# Altium PCB PCB1.PcbDoc
Units mil, origin at the board's own origin, x right, y up, seen from the top; angles counter-clockwise.
Board outline 6000 x 4000 mil, 2 copper layers (Top Layer, Bottom Layer); 13 components, 3 nets, 33 pads, 0 vias.
Unrouted connection lines stored in the file: 6.
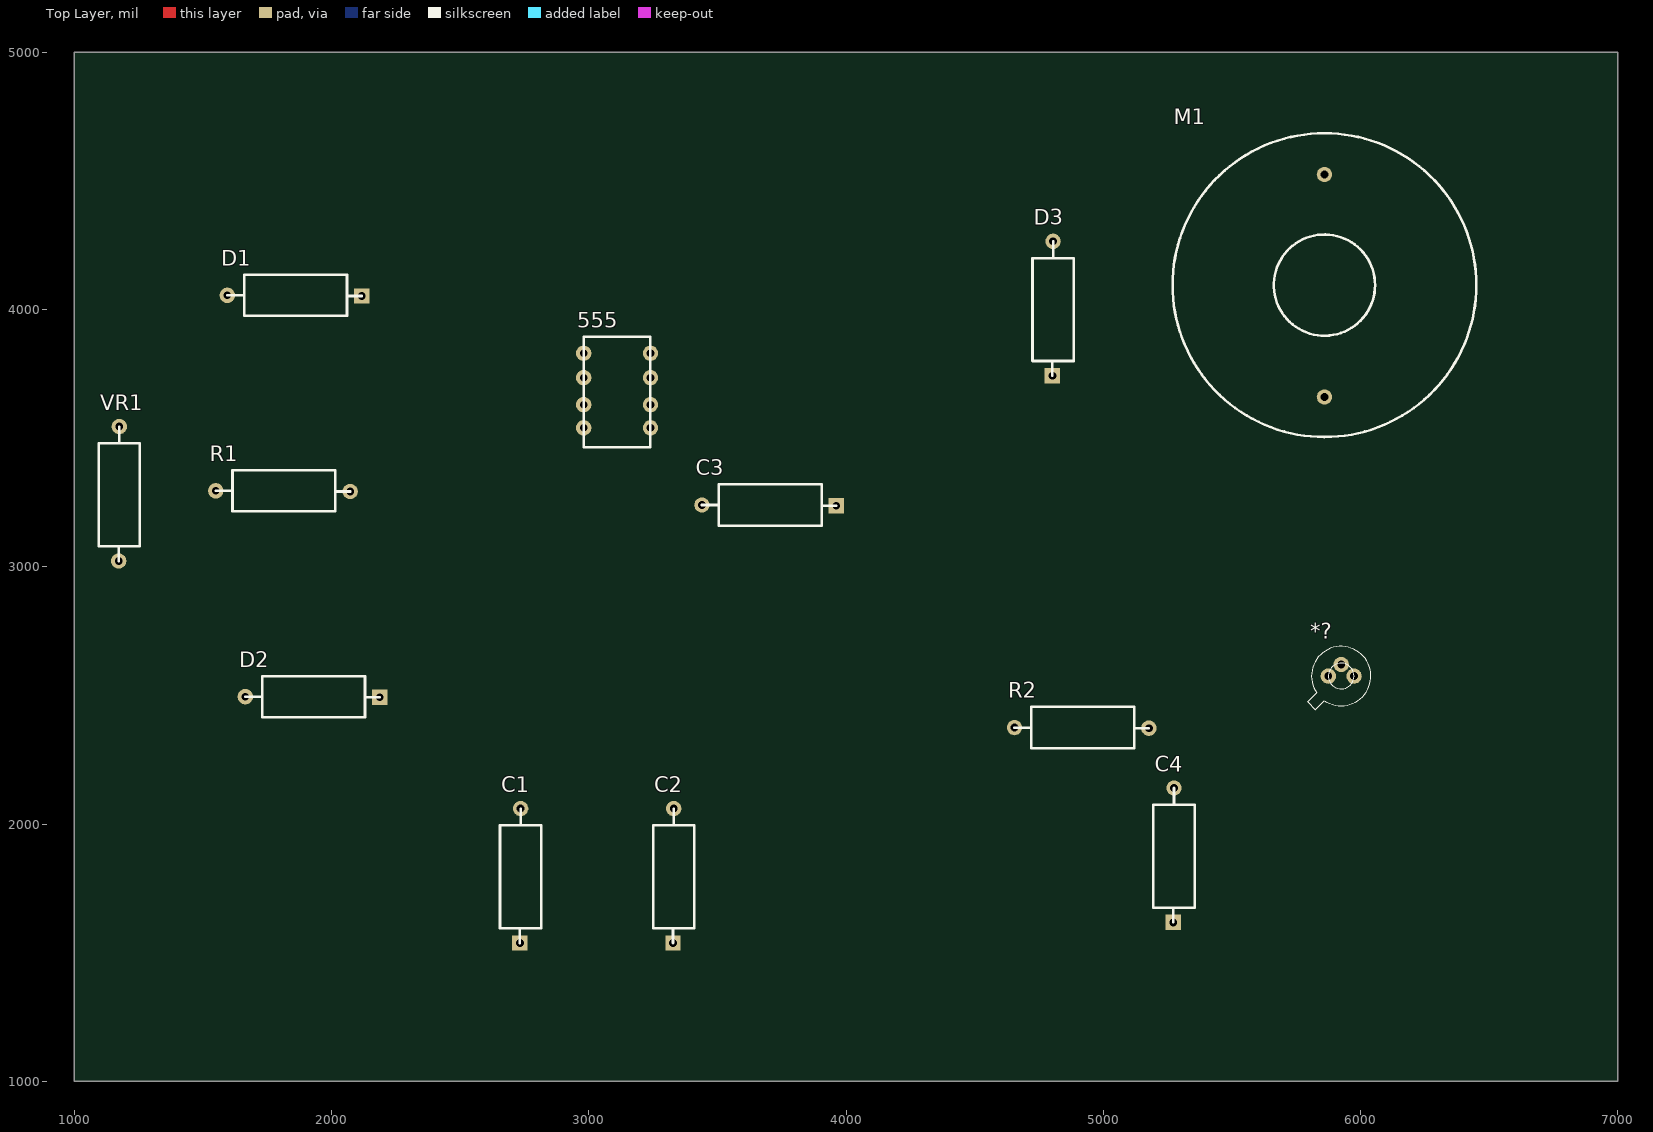
[diagram p0: Top Layer view]
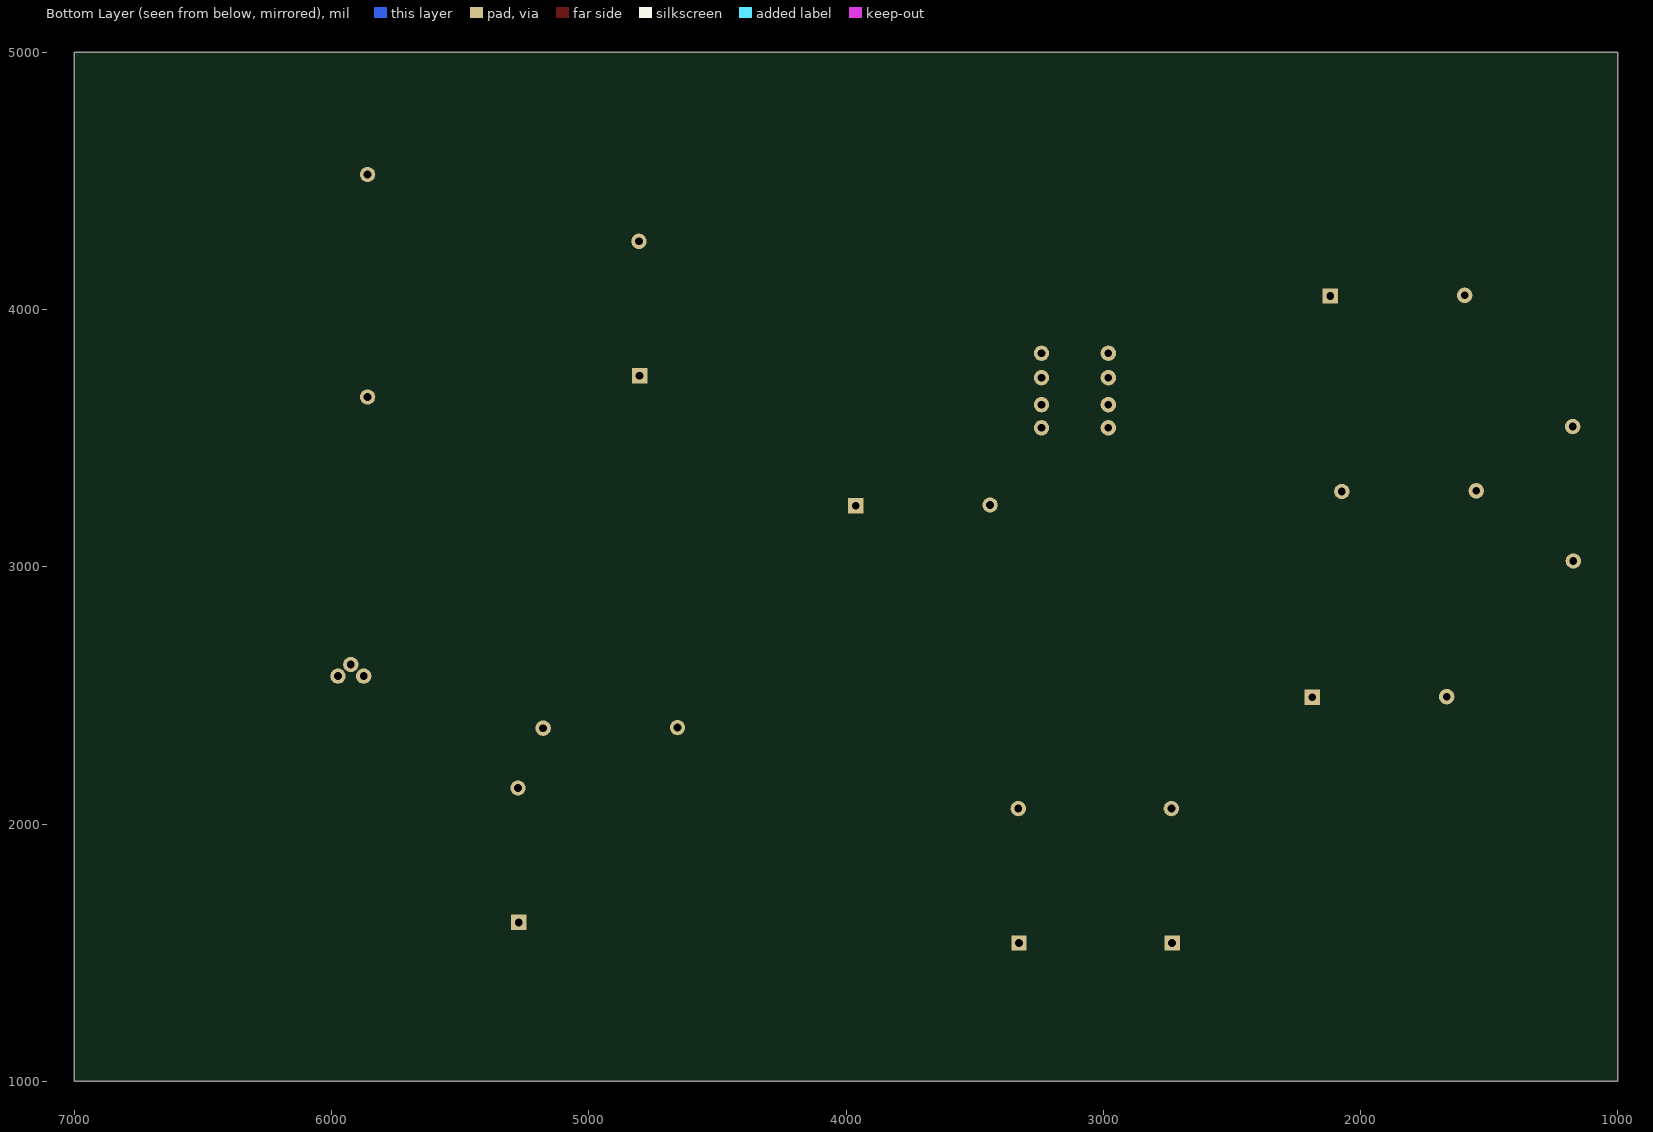
[diagram p1: Bottom Layer view, seen from below]

## Layer stack, top to bottom
Top Solder: solder mask 0.4, Solder Resist, Dk 3.5
Top Layer: signal copper 1.4
Dielectric 1: dielectric 12.6, FR-4, Dk 4.8
Bottom Layer: signal copper 1.4
Bottom Solder: solder mask 0.4, Solder Resist, Dk 3.5

## Board outline
1000,1000 7000,1000 7000,5000 1000,5000

## Design rules (kind name [scope] priority, off if disabled: settings)
Clearance [All] p1: gap=10 ignorepadtopadclearanceinfootprint=FALSE except(0: Arc-Hole Track-Hole SMDPad-Hole THPad-Hole Via-Hole Fill-Hole Poly-Hole Region-Hole Text-Hole)
PolygonConnect [All] p1: connectstyle=Relief reliefconductorwidth=10 reliefentries=4 polygonreliefangle="90 Angle" airgapwidth=10
RoutingVias [All] p1: holewidth=28 width=50 viastyle="Through Hole" minholewidth=28 minwidth=50 maxholewidth=28 maxwidth=50
SolderMaskExpansion [All] p1: expansion=4 istentingtop=FALSE
Width [All] p1: maxlimit=10 minlimit=10 preferedwidth=10
30 further rules are at their usual default settings.

## Classes and differential pairs
component class Sheet1: *? C2 D? VR1

## Components (designator, comment, footprint, x,y, rotation, side; value= is the part's Value field where it differs from the comment)
555 "555" 555 3035,3540 r0 top (schematic designator *)
*? "Transistor" TRANSISTOR 5925,2575 r0 top
C1 "Capacitor 100n" "Polarized Capacitor" 2740,1795 r90 top (schematic designator *)
C2 "100n" "Polarized Capacitor" 3335,1795 r90 top (schematic designator C?)
C3 "100uF" "Polarized Capacitor" 3705,3245 r180 top (schematic designator C?)
C4 "Capacitor 100n" "Polarized Capacitor" 5280,1875 r90 top (schematic designator *)
D1 "LED" Diode 1850,4055 r180 top (schematic designator *)
D2 "LED" Diode 1920,2495 r180 top (schematic designator *)
D3 "LED" Diode 4805,4010 r90 top (schematic designator *)
M1 "Motor" Motor 5860,4095 r0 top (schematic designator *)
R1 "Resistor2" "Resistor 1" 1815,3330 r180 top (schematic designator *)
R2 "Resistor2" "Resistor 1" 4920,2410 r180 top (schematic designator *)
VR1 "Resistor2" "Resistor 1" 1210,3280 r90 top (schematic designator *)

## Footprints (in the part's own frame and the unit in brackets; to place one, negate y for a bottom-side part, rotate by r counter-clockwise, add the part's x,y. Pads: shape width x height; smd on the part's side, far side on the other; paste and mask are expansions set on the pad)
555 [mil]
  round 60 hole 30: 7(205,290) 8(205,195) 9(205,90) 10(205,0) 11(-55,290) 12(-55,195) 13(-55,90) 14(-55,0)
  silkscreen extent -55,-75 205,355
Diode [mil]
  rect 60x60 hole 30: 1(-267.5,2.5)
  round 60 hole 30: 2(255,0)
  silkscreen extent -268,-80 255,80
Motor [mil]
  round 60 hole 30: 1(0,430) 2(0,-435)
  silkscreen extent -591,-591 591,591
"Polarized Capacitor" [mil]
  rect 60x60 hole 30: 1(-257.5,7.5)
  round 60 hole 30: 2(265,5)
  silkscreen extent -258,-75 265,85
"Resistor 1" [mil]
  round 60 hole 30: 1(-257.5,37.5) 2(265,35)
  silkscreen extent -258,-45 265,115
TRANSISTOR [mil]
  round 60 hole 30: 4(0,45) 5(50,0) 6(-50,0)
  silkscreen extent -130,-130 115,115

## Part data
C1 C4: library part "Capacitor 1"
C2 C3: library part Capacitor

## Nets (pads, with @x,y where several pads share a name; then routed paths per layer and width w, separated by ;. In a path a pad name is that pad's centre, name@x,y a point inside that pad or via, vN(x,y) a via of type N, cw(c..) or ccw(c..) an arc to the next point about the centre after c; other vN are vias at no path point)
GND: C1.1 C2.2 C3.2 C4.1
Net*: C2.1 C3.1 D1.2
Net*_1: D3.2 VR1.1
pads on no net: 555.7 555.8 555.9 555.10 555.11 555.12 555.13 555.14 *?.4 *?.5 *?.6 C1.2 C4.2 D1.1 D2.1 D2.2 D3.1 M1.1 M1.2 R1.1 R1.2 R2.1 R2.2 VR1.2